# Altium PCB PCB5.PcbDoc (part 4 of 4)
Units mil, origin at the board's own origin, x right, y up, seen from the top; angles counter-clockwise.
Board outline 1968.5 x 2362.2 mil, 4 copper layers (Top Layer, GND, VCC, Bottom Layer), stack 30.634 mil thick; 134 components, 248 nets, 1063 pads, 694 vias.
Unrouted connection lines stored in the file: 163.
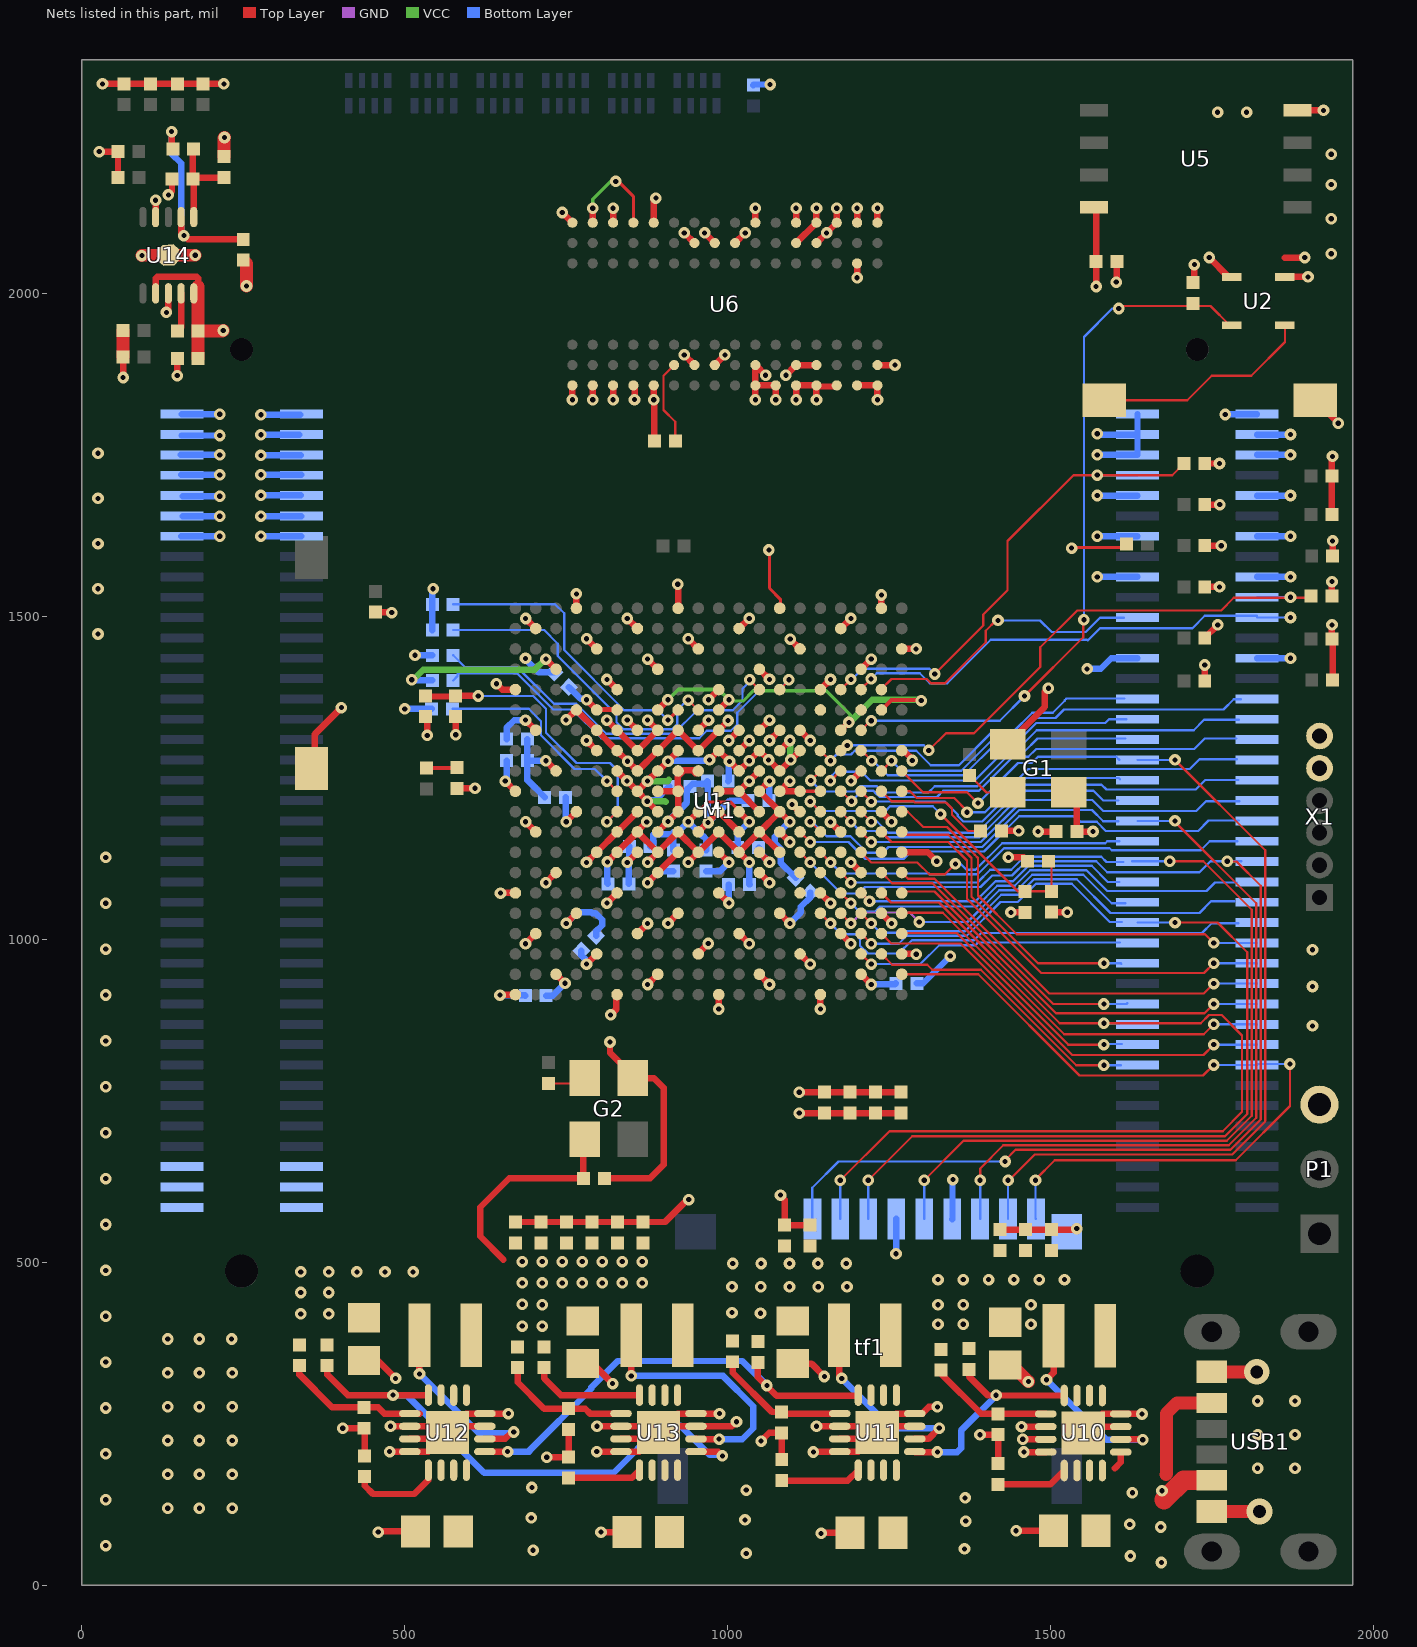
[diagram p6: the nets of this part, all layers, seen from the top]

## Via types
v1: diameter 18, hole 8, Top Layer to Bottom Layer, tented both sides, 692 vias
v2: diameter 40, hole 20, Top Layer to Bottom Layer, tented both sides, 2 vias

## Nets (pads, with @x,y where several pads share a name; then routed paths per layer and width w, separated by ;. In a path a pad name is that pad's centre, name@x,y a point inside that pad or via, vN(x,y) a via of type N, cw(c..) or ccw(c..) an arc to the next point about the centre after c; other vN are vias at no path point) (continued)
GND: C1.1 C2.1 C3.1 C4.2 C5.2 C6.1 C7.1 C8.2 C9.2 C10.2 C12.2 C13.2 C14.2 C15.2 C16.2 C17.2 C18.2 C21.2 C22.2 C23.2 C24.1 C25.1 C26.1 C27.1 C30.2 C31.2 C33.2 C35.2 C37.2 C39.2 C42.2 C44.2 C45.2 C46.2 C47.2 C48.2 C113.2 C114.2 C115.2 C117.2 C119.2 C120.2 C122.2 C124.2 C126.2 C127.1 C128.1 C129.1 C130.1 C131.1 C132.1 C133.1 C134.1 C135.1 C136.1 C137.1 C138.1 C148.2 C213.2 DONE.2 G1.2 G2.2 M1.J1_67 M1.J1_68 M1.J1_69 M1.J1_70 M1.J1_71 M1.J1_72 M1.J1_73 M1.J1_74 M1.J2_1 M1.J2_2 M1.J2_3 M1.J2_4 M1.J2_5 M1.J2_6 M1.J2_9 M1.J2_10 M1.J2_13 M1.J2_14 M1.J2_17 M1.J2_18 M1.J2_25 M1.J2_26 P1.3 R3.1 R6.1 R9.1 R12.1 R18.2 R22.2 R42.1 R52.1 R53.1 R54.1 R55.1 R57.1 R58.1 R61.2 R67.2 R70.1 RESET1.1 RESET2.1 tf1.6 tf1.10 U1.A8 U1.A18 U1.B1 U1.B11 U1.C4 U1.C9 U1.C14 U1.D17 U1.E10 U1.E20 U1.F3 U1.F7 U1.F10 U1.G10 U1.G12 U1.G16 U1.H7 U1.H9 U1.H11 U1.H13 U1.H19 U1.J2 U1.J8 U1.J10 U1.J12 U1.K5 U1.K7 U1.K10 U1.K11 U1.K13 U1.K15 U1.L8 U1.L9 U1.L12 U1.L18 U1.M1 U1.M7 U1.M9 U1.M10 U1.M11 U1.M13 U1.N4 U1.N8 U1.N10 U1.N12 U1.N14 U1.P7 U1.P9 U1.P11 U1.P13 U1.P17 U1.R8 U1.R12 U1.R20 U1.T3 U1.T7 U1.T13 U1.U6 U1.U16 U1.V9 U1.V19 U1.W2 U1.W12 U1.Y5 U1.Y15 U2.1 U5.4 U6.A9 U6.B1 U6.B3 U6.B9 U6.D1 U6.D8 U6.E1 U6.E2 U6.E8 U6.F9 U6.G1 U6.G8 U6.G9 U6.J2 U6.J8 U6.M1 U6.M9 U6.P1 U6.P9 U6.T1 U6.T9 U10.6 U10.7 U10.8 U10.15 U10.16 U10.20 U11.6 U11.7 U11.8 U11.15 U11.16 U11.20 U12.6 U12.7 U12.8 U12.15 U12.16 U12.20 U13.6 U13.7 U13.8 U13.15 U13.16 U13.20 U14.4 U14.8 U14.11 USB1.A12 USB1.B12 X1.5 | length 9508.1
  Top Layer w3.5: U1.C9@1206.85,1260.85 U1.C9@1207.15,1261.15
  Top Layer w6: U1.F10@1112.35,1229.45 U1.E10@1143.85,1229.45
  Top Layer w10: v1(27,2220) C1.1@55.86,2220 56,2219.86 C2.1@56,2180 ; v1(32,2325) C27.1@65,2325 C24.1@106.09,2325 C25.1@148,2325 C26.1@188,2325 v1(220,2325) ; v1(63.86,1870.14) C6.1@63.86,1902 ; U14.4@114.3,2118.7 v1(114.3,2144.7) ; v1(131,1971) 134,1974 U14.8@134,2000.5 ; v1(134,2153) 139.64,2158.64 R18.2@139.64,2177.59 ; v1(147.86,1873.14) C5.2@147.86,1900 ; RESET2.1@356,1264.61 361,1269.61 361,1318 v1(402,1359) ; v1(404.14,242.86) R9.1@437,242.86 438,241.86 C134.1@438,200.14 ; C135.1@437,348 458,348 v1(486,320) ; v1(459,82) 460,83 C133.1@517,83 ; v1(476.59,206.59) U12.8@508.05,206.59 536.65,206.59 U12.20@556.35,226.29 ; v1(478.11,245.89) U12.6@508.05,245.89 556.35,245.89 U12.20@566.15,236.09 ; U12.7@508.05,226.29 U12.20@556.35,226.29 ; v1(535,1316) DONE.2@535,1343.86 ; U12.15@624.25,245.89 U12.20@575.95,245.89 ; v1(642,1396) 651.15,1386.85 U1.Y5@671.45,1386.85 ; v1(648.36,1071.71) 648.6,1071.95 U1.Y15@671.45,1071.95 ; v1(660.59,265.59) U12.16@624.25,265.59 595.65,265.59 U12.20@575.95,245.89 ; C37.2@671.62,562.28 C148.2@711.1,562.28 C21.2@750.57,562.28 C22.2@790.05,562.28 C18.2@869,562.28 903.28,562.28 938,597 v1(940,597) ; v1(687.25,1182.15) U1.W12@702.95,1166.45 ; v1(687.25,1497.05) U1.W2@702.95,1481.35 ; v1(718.75,1276.55) U1.V9@734.45,1260.85 ; v1(720,198) 720.14,198.14 C137.1@754,198.14 R12.1@754,240.86 ; U1.V19@734.45,945.95 v1(748.4,932) ; v1(744.03,2125.73) U6.T1@759.78,2109.98 ; v1(750,1340) 765.35,1355.35 U1.U6@765.95,1355.35 U1.T7@797.45,1323.85 U1.R8@828.95,1292.35 v1(845.3,1276) U1.P9@860.45,1260.85 U1.N8@891.95,1292.35 U1.M7@923.45,1323.85 U1.M7@923.45,1323.85 U1.L8@954.85,1292.35 U1.K7@986.45,1323.85 U1.K7@986.45,1323.85 1001,1338.4 v1(1001,1339) ; v1(750.2,1024.7) U1.U16@765.95,1040.45 ; v1(759.78,1835.74) U6.T9@759.78,1858.02 ; C138.1@776,343 791,343 v1(822,312) ; v1(781.7,1119.2) U1.T13@797.45,1134.95 U1.R12@828.95,1166.45 829.05,1166.45 U1.P11@860.45,1197.85 ; v1(781.75,1465.55) U1.T3@797.45,1449.85 ; v1(797.59,206.59) U13.8@835.05,206.59 863.65,206.59 U13.20@883.35,226.29 ; v1(797.89,245.89) U13.6@835.05,245.89 883.35,245.89 U13.20@893.15,236.09 ; v1(804,82) C136.1@844,82 ; C10.2@809.14,630 880,630 901,651 901,770 885.76,785.24 G2.2@853.4,785.24 853.4,789.18 818,824.58 v1(818,841) ; v1(819,883) 827.42,891.42 827.42,912.92 U1.R20@828.95,914.45 ; v1(822.77,1835.74) U6.P9@822.77,1858.02 ; U6.P1@822.77,2109.98 v1(822.77,2132.26) ; U13.7@835.05,226.29 U13.20@883.35,226.29 ; v1(844.7,1119.2) U1.P13@860.45,1134.95 ; v1(844.7,1339.6) U1.P7@860.45,1323.85 U1.P7@858.15,1323.85 ; U1.P17@860.45,1008.95 860.65,1008.95 v1(876.25,1024.55) ; v1(876.2,1087.7) U1.N14@891.95,1103.45 U1.M13@923.45,1134.95 ; v1(876.25,1434.05) U1.N4@891.95,1418.35 ; U6.M9@885.76,1858.02 v1(885.76,1835.74) 886.86,1834.65 R61.2@886.86,1772 ; U6.M1@885.76,2109.98 885.76,2144.76 v1(889,2148) ; U1.N12@891.95,1166.45 891.95,1166.57 907.83,1182.45 v1(907.83,1182.57) 908,1182.57 923.28,1197.85 U1.M11@923.45,1197.85 U1.M10@923.45,1229.45 ; U1.N10@891.95,1229.45 U1.M10@923.45,1229.45 ; v1(923,1550) 923.45,1549.55 U1.M1@923.45,1512.85 ; U1.M9@923.45,1260.85 U1.M9@927.48,1256.82 ; U1.L18@954.85,977.45 954.85,978.15 v1(970.25,993.55) ; U1.L12@954.85,1166.45 969.4,1181 v1(970,1181) 970,1181.2 986.45,1197.65 U1.K11@986.45,1197.85 U1.J12@1017.85,1166.45 ; U1.L9@954.85,1260.85 953.85,1260.85 950.32,1257.32 945.98,1261.65 932.31,1261.65 U1.M9@927.48,1256.82 ; v1(964.5,2094.24) U6.J2@980.25,2078.49 ; v1(970.6,1371) U1.K5@986.45,1386.85 ; U6.J8@980.25,1889.51 v1(996,1905.26) ; U1.K15@986.45,1071.95 v1(1002.15,1056.25) ; U1.K13@986.45,1134.95 v1(1002.15,1119.25) ; U1.K10@986.45,1229.45 U1.J10@1017.85,1229.45 ; v1(987.59,265.59) U13.16@951.25,265.59 922.65,265.59 U13.20@902.95,245.89 ; v1(1014,253) 1006.89,245.89 U13.15@951.25,245.89 U13.20@902.95,245.89 ; U1.J8@1017.85,1292.35 v1(1033.55,1308.05) ; U1.J2@1017.85,1481.35 v1(1033.6,1497.1) ; v1(1043.24,1835.74) U6.G9@1043.24,1858.02 ; U6.G1@1043.24,2109.98 v1(1043.24,2132.26) ; U1.H19@1049.35,945.95 v1(1065.1,930.2) ; U1.H13@1049.35,1134.95 v1(1065.1,1119.2) ; U1.H11@1049.35,1197.85 U1.J10@1017.85,1229.45 U1.J10@1017.85,1229.45 ; U1.H9@1049.35,1260.85 1049.25,1260.85 v1(1033.55,1245.15) U1.J10@1017.85,1229.45 ; U1.H7@1049.35,1323.85 v1(1065.1,1339.6) ; v1(1052,223) 1064.76,235.76 R6.1@1083.85,235.76 1083.85,194.29 C132.1@1084,194.14 ; v1(1058.99,1873.76) U6.G8@1043.24,1889.51 U6.G9@1043.24,1858.02 ; v1(1074.74,1835.74) U6.F9@1074.74,1858.02 U6.G9@1043.24,1858.02 ; U1.G16@1080.85,1040.45 v1(1096.6,1024.7) ; U1.G12@1080.85,1166.45 v1(1096.55,1150.75) ; v1(1082,604) 1082,603 1088.37,596.63 C120.2@1088.37,557.28 C126.2@1128,557.28 ; v1(1090.49,1873.76) U6.E8@1106.24,1889.51 U6.D8@1137.73,1889.51 ; v1(1096.55,1245.15) U1.G10@1080.85,1229.45 U1.F10@1112.35,1229.45 ; v1(1097.2,1465) U1.F3@1112.35,1449.85 ; C131.1@1101,343 1130,343 v1(1150,323) ; U6.E2@1106.24,2078.49 U6.D1@1137.73,2109.98 v1(1137.73,2132.26) ; U6.E1@1106.24,2109.98 v1(1106.24,2132.26) ; v1(1111.1,763.28) C31.2@1150.57,763.28 C30.2@1190.05,763.28 C8.2@1229.52,763.28 C9.2@1269,763.28 ; U1.F7@1112.35,1323.85 v1(1128.1,1308.1) ; v1(1133,206) 1133.59,206.59 U11.8@1173.9,206.59 1202.5,206.59 U11.20@1222.2,226.29 ; v1(1137.89,245.89) U11.6@1173.9,245.89 1222.2,245.89 U11.20@1232,236.09 ; v1(1143.85,892.17) U1.E20@1143.85,914.45 ; v1(1145,80) 1146,81 C130.1@1190,81 ; U11.7@1173.9,226.29 U11.20@1222.2,226.29 ; U1.D17@1175.35,1008.95 v1(1191.1,993.2) ; v1(1191.1,1119.2) U1.C14@1206.85,1103.45 ; v1(1191.4,1245.4) U1.C9@1206.85,1260.85 ; U6.B9@1200.72,1858.02 U6.A9@1232.22,1858.02 v1(1232.22,1835.74) ; v1(1200.72,2024.72) U6.B3@1200.72,2046.99 ; U6.B1@1200.72,2109.98 v1(1200.72,2132.26) ; U1.C4@1206.85,1418.35 v1(1222.6,1434.1) ; U1.B11@1238.35,1197.85 v1(1254.05,1182.15) ; U1.B1@1238.35,1512.85 v1(1238.35,1533.35) ; U1.A18@1269.85,977.45 1291.62,977.45 v1(1292.21,976.86) ; U1.A8@1275.47,1290.03 1286,1279.5 v1(1286,1277) ; U11.15@1290.1,245.89 1248.11,245.89 U11.20@1244.95,249.05 ; v1(1325,276) 1312.02,276 1301.62,265.59 U11.16@1290.1,265.59 1261.5,265.59 U11.20@1244.95,249.05 ; v1(1391.14,232.86) R3.1@1419,232.86 C129.1@1419,188.14 ; C47.2@1421.81,550.36 C114.2@1461.85,550.36 C115.2@1501.89,550.36 1539.36,550.36 v1(1541,552) ; G1.2@1433.76,1302.4 1491.35,1360 1491.35,1383.35 v1(1497,1389) ; v1(1435,1127) 1458.86,1127 C213.2@1464.86,1121 ; v1(1438.86,1041.86) R22.2@1461,1041.86 ; v1(1447,84) C127.1@1505,84 ; v1(1455.3,245.3) U10.6@1492.9,245.3 ; v1(1457.3,225.7) U10.7@1492.9,225.7 ; v1(1459,206) U10.8@1492.9,206 ; v1(1481,1167) C46.2@1508.86,1167 ; U10.20@1551,235.5 U10.20@1560.8,245.3 ; v1(1602,2018) 1603.14,2019.14 C48.2@1603.14,2050 ; U10.15@1609.1,245.3 U10.20@1560.8,245.3 ; v1(1642,265) U10.16@1609.1,265 1580.5,265 U10.20@1560.8,245.3 ; R53.1@1739.14,1546 v1(1762,1546) ; R55.1@1739.14,1609.67 v1(1764.67,1609.67) ; R54.1@1739.14,1673.33 v1(1762.33,1673.33) ; R52.1@1739.14,1737 v1(1762,1737) ; v1(1746,2056) 1776,2026 U2.1@1780.7,2026 ; U5.4@1882.85,2284 v1(1923,2284) ; RESET1.1@1910.39,1835 v1(1946,1799.39) ; R42.1@1936.14,1532 v1(1936.14,1554.14) ; R58.1@1936.14,1658 R57.1@1936.14,1718 1936.14,1747.14 v1(1937,1748) ; U12.20@556.35,226.29 U12.20@566.15,236.09 ; U12.20@566.15,236.09 U12.20@575.95,245.89 ; U13.20@883.35,226.29 U13.20@893.15,236.09 ; U13.20@893.15,236.09 U13.20@902.95,245.89 ; U1.M10@923.45,1229.45 927.48,1233.48 922.65,1238.32 922.65,1251.98 U1.M9@927.48,1256.82 ; U11.20@1222.2,226.29 U11.20@1232,236.09 ; U11.20@1232,236.09 U11.20@1244.95,249.05
  Top Layer w20: C7.1@63.72,1943 63.86,1942.86 C6.1@63.86,1902 ; v1(93,2059) 93.6,2059.6 U14.11@134,2059.6 v1(175.6,2059.6) ; C4.2@220,2212.14 220,2241 v1(221,2242) ; C3.1@250,2051.86 255,2046.86 v1(255,2012) ; C128.1@1430,341 1440,341 v1(1466,315) ; USB1.B12@1750.19,113.74 v2(1823.73,113.74) ; USB1.A12@1750.19,330.26 v2(1819.73,330.26)
  Bottom Layer w10: M1.J1_68@153.96,1624.38 v1(213.62,1624.38) ; M1.J1_74@153.96,1719.38 v1(213.62,1719.38) ; M1.J1_70@155.96,1655.38 v1@215.62,1655.38 ; M1.J1_72@155.96,1686.38 v1@215.62,1686.38 ; v1@279.38,1687.62 M1.J1_71@339.04,1687.62 ; v1@280.38,1624.62 M1.J1_67@340.04,1624.62 ; v1@280.38,1655.62 M1.J1_69@340.04,1655.62 ; v1@280.38,1719.62 M1.J1_73@340.04,1719.62 ; v1(516,1440) R70.1@542.86,1440 ; v1(687.2,1435.19) 687.2,1433.8 707.59,1413.41 C13.2@731.59,1413.41 ; C16.2@690.14,1310 C17.2@690.14,1277 ; C12.2@716.86,1220 690.14,1246.72 C17.2@690.14,1277 ; v1(718.75,1276.55) 690.59,1276.55 C17.2@690.14,1277 ; C15.2@719.14,913 729.4,913 v1(748.4,932) ; v1(750.2,1024.7) 750.3,1024.7 767.8,1042.2 788.95,1042.2 790.7,1040.45 795.55,1040.45 805.79,1030.21 805.79,1021.92 796.41,1012.54 C39.2@796.41,1005.41 ; C42.2@847.14,1086 847.14,1116.76 v1(844.7,1119.2) 847.86,1122.36 C117.2@847.86,1144 ; v1(876.2,1087.7) 894.36,1105.86 C33.2@916,1105.86 ; v1(907.83,1182.57) 937.21,1211.96 937.21,1232.07 C122.2@942.14,1237 946.14,1241 964.86,1241 C124.2@968.86,1245 969.43,1244.43 969.43,1181.57 v1(970,1181) 1004,1215 C45.2@1031.86,1215 ; C119.2@967,1105.86 988.76,1105.86 v1(1002.15,1119.25) ; C113.2@1001.86,1085 1001.86,1056.54 v1(1002.15,1056.25) ; R67.2@1040,2323.14 1040.86,2324 v1(1066,2324) ; C35.2@1048.14,1142 1048.14,1136.16 v1(1065.1,1119.2) ; v1(1096.6,1024.7) 1113.57,1041.67 1113.57,1050.62 1128.41,1065.46 C44.2@1128.41,1072.59 ; C14.2@1293.14,932 1303,932 v1(1345,974) ; tf1.6@1347.95,566.82 1348.48,567.34 1348.48,627.48 v1(1349,628) ; v1(1557,1419) 1578,1419 1594.43,1435.43 M1.J2_25@1634.98,1435.43 ; v1(1572.58,1561.42) M1.J2_17@1634.98,1561.42 ; v1@1575.41,1624.41 M1.J2_13@1634.98,1624.41 ; v1@1575.4,1687.4 M1.J2_9@1634.98,1687.4 ; v1@1576.61,1750.39 M1.J2_5@1634.98,1750.39 M1.J2_3@1634.98,1781.89 ; v1@1577,1783 1578.11,1781.89 M1.J2_3@1634.98,1781.89 ; M1.J2_1@1634.98,1813.38 M1.J2_3@1634.98,1781.89 ; v1(1771,1813) 1771.38,1813.38 M1.J2_2@1820.03,1813.38 ; M1.J2_18@1820.02,1561.42 v1(1871.89,1561.42) ; M1.J2_10@1820.02,1687.4 v1(1871.89,1687.4) ; M1.J2_6@1820.02,1750.39 v1(1871.89,1750.39) ; M1.J2_4@1820.02,1781.89 v1(1871.89,1781.89) ; M1.J2_26@1820.03,1435.43 v1(1871.89,1435.43) ; M1.J2_14@1820.03,1624.41 v1(1871.89,1624.41)
  other v1: 37,61 37,132.07 1821,181 1879,181 37,203.13 1821,233 1879,233 37,274.2 1821,285 1879,285 37,345.27 37,416.33 37,487.4 37,558.47 37,629.53 37,700.6 37,771.67 37,842.73 1906,866 37,913.8 1906,927 1906,984 37,984.87 37,1055.93 37,1127 25,1473 25,1543 25,1613 1572.58,1624.41 277.38,1624.62 213.62,1655.38 277.38,1655.62 25,1683 213.62,1686.38 1572.58,1687.4 277.38,1687.62 277.38,1719.62 1572.58,1750.39 25,1753 1572.58,1783 1935,2062 1935,2116 1935,2169 1935,2216 1759,2281 1804,2281
MIO9: M1.J2_21 U1.B5 | length 452.5
  Top Layer w3.5: U1.B5@1238.2,1387.7 1253.95,1403.45 1308.4,1403.45 1315.1,1396.75 1336.75,1396.75 1400,1460 1400,1478 1416,1494 v1(1419,1494)
  Bottom Layer w3.5: v1(1419,1494) 1484,1494 1502,1476 1555,1476 1577,1498 M1.J2_21@1614,1498
MIO10: M1.J2_33 U1.E9 | length 557
  Top Layer w3.5: v1(1129,1246) U1.E9@1143.85,1260.85
  Bottom Layer w3.5: v1(1129,1246) 1146,1229 1197.2,1229 1205.2,1237 1231,1237 1240.6,1227.4 1311.4,1227.4 1321,1237 1386.73,1237 1439.41,1289.69 1458.69,1289.69 1480,1311 M1.J2_33@1616,1311
MIO11: U1.C6
MIO12: M1.J2_32 U1.D9 | length 708.9
  Top Layer w3.5: v1(1159.4,1245.4) U1.D9@1175.15,1261.15
  Bottom Layer w3.5: v1(1159.4,1245.4) 1159.4,1251.4 1167.65,1259.65 1207.35,1259.65 1221,1246 1383,1246 1433.69,1296.69 1451.69,1296.69 1479,1324 1722,1324 1738,1340 M1.J2_32@1792,1340
MIO13: M1.J2_29 U1.E8 | length 536.5
  Top Layer w3.5: U1.E8@1143.7,1292.5 v1(1159.45,1276.75)
  Bottom Layer w3.5: v1(1159.45,1276.75) 1168.95,1286.25 1191.25,1286.25 1197,1292 1292.35,1292 1314.6,1269.75 1358.39,1269.75 1409.64,1321 1442,1321 1472,1351 1503.64,1351 1522.25,1369.61 1522.25,1370.25 1525,1373 M1.J2_29@1615,1373
MIO14: M1.J2_22 U1.C5 | length 728.5
  Top Layer w3.5: U1.C5@1206.7,1387.7 v1(1222.45,1403.45)
  Bottom Layer w3.5: v1(1222.45,1403.45) 1231,1412 1297.8,1412 1313.05,1396.75 1340.49,1396.75 1407.74,1464 1556.8,1464 1557.8,1463 1558,1463 1577,1482 1720,1482 1739.25,1501.25 1820.02,1501.25 M1.J2_22@1820.02,1498.42 v1(1871.89,1498.42)
MIO15: M1.J2_31 U1.C8 | length 462.3
  Top Layer w3.5: U1.C8@1207.7,1292.5 v1(1223.45,1276.75)
  Bottom Layer w3.5: v1(1223.45,1276.75) 1225.25,1276.75 1248,1254 1366,1254 1418,1306 1449,1306 1478,1335 1585,1335 1591,1341 M1.J2_31@1618,1341
MIO16: M1.J2_66 tf1.9 U1.A19 | length 1241.3
  Top Layer w3.5: U1.A19@1269.85,945.95 1388.14,945.86 1545,789 1736.52,789 v1(1753,805.48) ; v1(1477,627) 1477,628 1507,658 1787,658 1871,742 v1(1871,807)
  Bottom Layer w3.5: v1(1477,627) 1477,567.69 tf1.9@1477.87,566.82 ; v1(1753,805.48) M1.J2_66@1820.03,805.47 ; M1.J2_66@1820.03,805.47 1821.55,807 v1(1871,807)
MIO17: U1.E14
MIO18: M1.J2_65 U1.B18 | length 442.1
  Top Layer w3.5: U1.B18@1238.35,977.45 1255.05,960.75 1309.25,960.75 1317.14,952.86 1392.15,952.86 1540.01,805 v1@1585,805
  Bottom Layer w3.5: v1@1585,805 M1.J2_65@1609,805
  other v1: 1583,805
MIO19: M1.J2_34 U1.D10 | length 666.5
  Top Layer w3.5: U1.D10@1176.2,1229.6 v1(1191.95,1213.85)
  Bottom Layer w3.5: v1(1191.95,1213.85) 1208.1,1230 1226,1230 1228.35,1227.65 1228.5,1227.65 1235.75,1220.4 1324.4,1220.4 1334,1230 1389.63,1230 1442.31,1282.69 1465.69,1282.69 1478,1295 1723,1295 1739,1311 M1.J2_34@1788,1311
MIO20: M1.J2_63 U1.A17 | length 413.1
  Top Layer w3.5: U1.A17@1269.93,1009.86 1354.95,1009.86 1527.8,837 v1@1586,837
  Bottom Layer w3.5: v1@1586,837 1587,838 M1.J2_63@1611,838
  other v1: 1583,837
MIO21: U1.F14
MIO22: M1.J2_64 U1.B17 | length 666.1
  Top Layer w3.5: U1.B17@1238.35,1008.95 1253.55,993.75 1361.16,993.75 1533.91,821 1737.02,821 v1(1753,836.98)
  Bottom Layer w3.5: v1(1753,836.98) M1.J2_64@1820.02,836.97
MIO23: M1.J2_39 U1.D11 | length 482.3
  Top Layer w3.5: U1.D11@1175.35,1197.85 v1(1191.1,1182.1)
  Bottom Layer w3.5: v1(1191.1,1182.1) v1(1191.1,1182.1) 1205.3,1167.9 1228.46,1167.9 1228.56,1168 1236,1168 1246,1158 1389.7,1158 1461.7,1230 1567,1230 1582,1215 M1.J2_39@1605,1215
MIO24: M1.J2_62 U1.A16 | length 634.9
  Top Layer w3.5: U1.A16@1269.85,1040.45 1270.65,1041.25 1333.45,1041.25 1521.7,853 1737.53,853 v1(1753,868.47)
  Bottom Layer w3.5: v1(1753,868.47) M1.J2_62@1820.02,868.46
MIO25: U1.F15
MIO26: M1.J2_60 U1.A15 | length 634.9
  Top Layer w3.5: U1.A15@1269.85,1071.95 1271.9,1074 1320.5,1074 1508.75,885.75 1738.74,885.75 v1(1753,900.01)
  Bottom Layer w3.5: v1(1753,900.01) M1.J2_60@1820.02,900
MIO27: U1.D13
MIO28: M1.J2_50 U1.C16 | length 653.3
  Top Layer w3.5: U1.C16@1206.85,1040.45 v1(1222.6,1024.7)
  Bottom Layer w3.5: v1@1222.6,1023.6 1223.7,1023.6 1236.85,1010.45 1272.55,1010.45 1274.85,1012.75 1367.75,1012.75 1424,1069 1450.7,1069 1474.7,1093 1541,1093 1593,1041 1731,1041 1749,1059 1785,1059
MIO29: M1.J2_43 U1.C13 | length 443.2
  Top Layer w3.5: U1.C13@1206.85,1134.95 1222.8,1119 1294,1119 1312.25,1100.75 1336.75,1100.75 v1(1353,1117)
  Bottom Layer w3.5: v1(1353,1117) 1360.75,1117 1370,1107.75 1384.25,1107.75 1425.5,1149 1585,1149 1588,1152 M1.J2_43@1607,1152
MIO30: M1.J2_47 U1.C15 | length 438.6
  Top Layer w3.5: U1.C15@1206.85,1071.95 1219.8,1059 v1(1220,1059)
  Bottom Layer w3.5: v1(1220,1059) 1384,1059 1415,1090 1442,1090 1466,1114 1564,1114 1589,1089 M1.J2_47@1607,1089
MIO31: M1.J2_52 U1.E16 | length 698.5
  Top Layer w3.5: U1.E16@1143.85,1040.45 v1(1159.6,1024.7)
  Bottom Layer w3.5: v1(1159.6,1024.7) 1176.3,1008 1198,1008 1205.35,1000.65 1205.35,990.3 1217.65,978 1265,978 1285.75,998.75 1381.75,998.75 1393,1010 1735,1010 1750,1025 M1.J2_52@1791,1025
MIO32: M1.J2_58 U1.A14 | length 634.2
  Top Layer w3.5: U1.A14@1269.85,1103.45 1279.55,1093.75 1320.55,1093.75 1498.3,916 1737.5,916 v1(1753,931.5)
  Bottom Layer w3.5: v1(1753,931.5) M1.J2_58@1820.03,931.49
MIO33: M1.J2_48 U1.D15 | length 670.8
  Top Layer w3.5: U1.D15@1175.35,1071.95 v1(1191.1,1056.2)
  Bottom Layer w3.5: v1(1191.1,1056.2) 1204.35,1042.95 1228.09,1042.95 1236.14,1051 1385.9,1051 1417.9,1083 1444.9,1083 1468.9,1107 1556,1107 1588,1075 1742,1075 1755,1088 M1.J2_48@1789,1088
MIO34: M1.J2_55 U1.A12 | length 460
  Top Layer w3.5: U1.A12@1269.85,1166.45 1274.3,1162 1342,1162 1378,1126 1378,1066 1481,963 v1(1583,963)
  Bottom Layer w3.5: v1(1583,963) 1609,963 M1.J2_55@1610,962
MIO35: M1.J2_42 U1.F12 | length 743.2
  Top Layer w3.5: U1.F12@1112.35,1166.45 v1(1128.05,1150.75)
  Bottom Layer w3.5: v1@1128.05,1154.05 v1(1128.05,1150.75) 1187.25,1150.75 1213,1125 1273.5,1125 1284.5,1136 1397.4,1136 1451.95,1190.55 1538.45,1190.55 1547,1182 1572,1182 1586,1168 1729,1168 1745,1184 M1.J2_42@1792,1184
MIO36: M1.J2_54 U1.A11 | length 668.3
  Top Layer w3.5: U1.A11@1269.85,1197.85 1279.15,1197.85 1303,1174 1340,1174 1383,1131 ; 1382.95,1130.95 1388,1125.9 1388,1068 1448,1008 1739.5,1008 v1(1753,994.5)
  Bottom Layer w3.5: v1(1753,994.5) M1.J2_54@1820.02,994.49
MIO37: M1.J2_36 U1.A10 | length 567.9
  Top Layer w3.5: U1.A10@1269.85,1229.45 1282.55,1229.45 1293,1219 1351,1219 1371,1199 v1(1371,1197)
  Bottom Layer w3.5: v1(1371,1197) 1381.85,1197 1382.1,1196.75 1398.75,1196.75 1465.75,1263.75 1715.75,1263.75 1731,1279 M1.J2_36@1789,1279
MIO38: M1.J2_44 U1.E13 | length 684.2
  Top Layer w3.5: U1.E13@1143.85,1134.95 v1(1159.6,1119.2)
  Bottom Layer w3.5: v1(1159.6,1119.2) 1176.8,1102 1312,1102 1313.25,1100.75 1387.75,1100.75 1428.25,1141.25 1591.75,1141.25 1595,1138 1733,1138 1747,1152 M1.J2_44@1790,1152
MIO39: M1.J2_53 U1.C18 | length 421.5
  Top Layer w3.5: U1.C18@1206.85,977.45 v1(1222.6,961.7)
  Bottom Layer w3.5: v1(1222.6,961.7) 1298.7,961.7 1328,991 1383.9,991 1387.9,995 M1.J2_53@1608,995
MIO46: M1.J2_49 U1.D16 | length 508.7
  Top Layer w3.5: U1.D16@1175.35,1040.45 v1(1191.1,1024.7)
  GND w3.5: v1(1191.1,1024.7) 1208,1041.6 1282.4,1041.6 v1(1297,1027)
  Bottom Layer w3.5: v1(1297,1027) 1371.8,1027 1420.8,1076 1447.8,1076 1471.8,1100 1551,1100 1595,1056 M1.J2_49@1616,1056
MIO47: M1.J2_59 U1.B14 | length 465.3
  Top Layer w3.5: U1.B14@1238.35,1103.45 1255.05,1086.75 1317.65,1086.75 1504.4,900 v1@1586,900
  Bottom Layer w3.5: v1@1586,900 1618,900 M1.J2_59@1619,901
  other v1: 1583,900
MIO48: M1.J2_56 U1.B12 | length 712.9
  Top Layer w3.5: U1.B12@1238.35,1166.45 1253.8,1151 1342,1151 1371,1122 1371,1063.1 1486.1,948 1738,948 v1(1753,963)
  Bottom Layer w3.5: v1(1753,963) M1.J2_56@1820.02,962.99
MIO49: M1.J2_40 U1.C12 | length 632.9
  Top Layer w3.5: U1.C12@1206.85,1166.45 v1(1222.55,1150.75)
  Bottom Layer w3.5: v1(1222.55,1150.75) 1392.34,1150.75 1457.6,1216 1565,1216 1582,1199 1726,1199 1741,1214 M1.J2_40@1793,1214
MIO50: U1.B13
MIO51: M1.J2_30 U1.B9 | length 615.6
  Top Layer w3.5: U1.B9@1238.35,1260.85 v1(1254.05,1276.55)
  Bottom Layer w3.5: v1(1254.05,1276.55) 1269.61,1261 1362,1261 1414,1313 1445,1313 1475,1343 1508,1343 1521,1356 1768,1356 1784,1372 M1.J2_30@1795,1372
MIO52: M1.J2_37 U1.C10 | length 450.4
  Top Layer w3.5: U1.C10@1206.85,1229.15 v1(1222.6,1213.4)
  Bottom Layer w3.5: v1(1222.6,1213.4) 1336.6,1213.4 1356.75,1193.25 1356.75,1191.1 1365.1,1182.75 1394.65,1182.75 1461.95,1250.05 1605.95,1250.05 M1.J2_37@1608,1248
MIO53: M1.J2_38 U1.C11 | length 638
  Top Layer w3.5: U1.C11@1206.85,1197.85 v1(1222.55,1182.15)
  Bottom Layer w3.5: v1(1222.55,1182.15) 1231.75,1182.15 1248.9,1165 1386.8,1165 1461.4,1239.6 1579.4,1239.6 1587,1232 1725,1232 1740,1247 M1.J2_38@1791,1247
MMC-CMD: M1.J2_51 tf1.3 U1.C17 | length 1602.6
  Top Layer w3.5: U1.C17@1206.85,1008.95 v1(1222.6,993.2) ; v1(1218.03,627) 1286.03,695 1770.31,695 1805,729.69 1805,980 1758.97,1026.03 v1(1693,1026.03)
  Bottom Layer w3.5: tf1.3@1218.03,566.82 v1(1218.03,627) ; v1(1222.6,993.2) 1265.2,993.2 1277.75,1005.75 1370.65,1005.75 1422.9,1058 1449.6,1058 1477.6,1086 1533,1086 1592,1027 M1.J2_51@1611,1027 ; M1.J2_51@1634.98,1025.98 v1(1693,1026.03)
MMC-D0: M1.J2_41 tf1.7 U1.E12 | length 1662.3
  Top Layer w3.5: v1(1128.25,1182.25) U1.E12@1144,1166.5 ; v1(1391.26,627) 1391.26,645.26 1427,681 1776.11,681 1819,723.89 1819,1055.85 1693,1181.85 v1(1693,1183.51)
  Bottom Layer w3.5: v1(1128.25,1182.25) 1130.75,1182.25 1153.13,1159.87 1190.62,1159.87 1216.5,1134 1240.5,1134 1249.5,1143 1394.5,1143 1452,1200.5 1564.5,1200.5 1582,1183 M1.J2_41@1605,1183 ; tf1.7@1391.26,566.82 v1(1391.26,627) ; M1.J2_41@1634.98,1183.46 v1(1693,1183.51)
MMC-D1: M1.J2_35 tf1.8 U1.A9 | length 1562
  Top Layer w3.5: U1.A9@1269.85,1260.85 1302.7,1228 1371,1228 v1(1388,1211) ; v1(1434.57,627) 1436,627 1476,667 1781.91,667 1833,718.09 1833,1138 v1(1693,1278)
  Bottom Layer w3.5: v1(1388,1211) 1450,1273 1471,1273 1481,1283 1602,1283 M1.J2_35@1607,1278 ; tf1.8@1434.57,566.82 v1(1434.57,627) ; M1.J2_35@1634.98,1277.95 M1.J2_35@1634.98,1277.95 v1(1693,1278)
MMC-D2: M1.J2_46 tf1.1 U1.F13 | length 1962.8
  Top Layer w3.5: U1.F13@1112.35,1134.95 v1(1128.1,1119.2) ; v1(1430,656) 1430,658 1446,674 1779.01,674 1826,720.99 1826,1083 1788.25,1120.75 1774.25,1120.75 v1(1774,1121)
  Bottom Layer w3.5: v1(1128.1,1119.2) 1176.3,1071 1203,1071 1213,1081 1392,1081 1410,1099 1440.64,1099 1462.64,1121 1571,1121 1588,1104 1731,1104 1748,1121 v1(1774,1121) M1.J2_46@1796,1121 ; tf1.1@1131.42,566.82 1131.42,615.42 1172,656 v1(1430,656)
MMC-D3: M1.J2_61 tf1.2 U1.B15 | length 1525.1
  Top Layer w3.5: v1(1174.72,627) 1250.72,703 1767,703 1797,733 1797,851 1765.28,882.72 1745.61,882.72 1732.89,870 v1(1583,870) 1514.6,870 1327.6,1057 1253.3,1057 U1.B15@1238.35,1071.95
  Bottom Layer w3.5: tf1.2@1174.72,566.82 v1(1174.72,627) ; v1@1587,870 M1.J2_61@1607,870
MMC-SCLK: M1.J2_45 tf1.5 U1.D14 | length 1608.3
  Top Layer w3.5: U1.D14@1175.35,1103.45 v1(1191.1,1087.7) ; v1(1304.65,627) 1365.65,688 1773.21,688 1812,726.79 1812,1046 1736.95,1121.05 v1(1685.02,1121.05)
  Bottom Layer w3.5: v1(1191.1,1087.7) 1191.4,1088 1387,1088 1406.75,1107.75 1439.49,1107.75 1459.74,1128 1579,1128 1587,1120 M1.J2_45@1613,1120 ; tf1.5@1304.65,566.82 v1(1304.65,627) ; M1.J2_45@1627.05,1121.05 v1(1685.02,1121.05)
NetC4_1: C4.1 R17.2 R18.1 U14.1 | length 155.4
  Top Layer w10: R17.2@173.14,2224 171.92,2222.78 R18.1@171.92,2177.59 ; U14.1@173.4,2118.7 173.4,2176.11 R18.1@171.92,2177.59 ; C4.1@220,2179.86 174.18,2179.86 R18.1@171.92,2177.59
NetC129_2: C129.2 U10.9 | length 111.4
  Top Layer w10: C129.2@1419,155.86 1499.96,155.86 U10.9@1521.5,177.4
NetC132_2: C132.2 U11.9 | length 125.2
  Top Layer w10: C132.2@1084,161.86 1186.36,161.86 U11.9@1202.5,178
NetC134_2: C134.2 U12.9 | length 142.2
  Top Layer w10: C134.2@438,167.86 438,154 451,141 515,141 536.65,162.65 U12.9@536.65,178
NetC137_2: C137.2 U13.9 | length 114.7
  Top Layer w10: C137.2@754,165.86 851.51,165.86 U13.9@863.65,178
NetDONE_1: DONE.1 R35.1 U1.R11 | length 463.9
  Top Layer w3.5: v1(813.25,1182.15) U1.R11@828.95,1197.85
  Top Layer w10: DONE.1@535,1376.14 578,1376.14 R35.1@579,1377.14 604.74,1377.14
  Bottom Layer w3.5: v1(614,1377) 699,1377 719,1357 719,1320 766,1273 818,1273 830,1261 830,1198.9 v1(813.25,1182.15)
NetG1_3: G1.3 R59.1 | length 69.6
  Top Layer w3.5: R59.1@1375,1253.86 1401.26,1227.6 G1.3@1433.76,1227.6
NetG2_3: G2.3 R15.1 | length 59.1
  Top Layer w3.5: R15.1@723,776.86 770.21,776.86 G2.3@778.6,785.24
NetL1_1: L1.1 U10.1 U10.2 U10.3
NetL2_1: L2.1 U11.1 U11.2 U11.3
NetL3_1: L3.1 U12.1 U12.2 U12.3
NetL4_1: L4.1 U13.1 U13.2 U13.3
NetR2_1: R2.1 R3.2 U10.5 | length 193.4
  Top Layer w10: R2.1@1331,332.86 1331,327 1392.86,265.14 R3.2@1419,265.14 1419.14,265 U10.5@1492.9,265
NetR5_1: R5.1 R6.2 U11.5 | length 209
  Top Layer w10: R5.1@1008,345.86 1008,329 1068.95,268.05 R6.2@1083.85,268.05 1086.3,265.59 U11.5@1173.9,265.59
NetR8_1: R8.1 R9.2 U12.5 | length 225.5
  Top Layer w10: R8.1@337,339.86 337,326 387.86,275.14 R9.2@437,275.14 458.86,275.14 468.41,265.59 U12.5@508.05,265.59 U12.5@523.61,265.59
NetR10_1: R10.1 U13.4 | length 175.1
  Top Layer w10: R10.1@716,336.72 716,320 741.81,294.19 U13.4@863.65,294.19
NetR11_1: R11.1 R12.2 U13.5 | length 202.8
  Top Layer w10: R11.1@675,336.72 675,314 715.86,273.14 R12.2@754,273.14 779.45,273.14 787,265.59 U13.5@835.05,265.59
NetR16_1: R16.1 U1.B10 | length 184.5
  Top Layer w3.5: U1.B10@1238.35,1229.45 1253.8,1214 1288.1,1214 1290.1,1212 1338.43,1212 1347.86,1202.57 1347.86,1193.14 1373,1168 R16.1@1391.86,1168
NetR19_1: R19.1 U14.9 | length 60.9
  Top Layer w10: R19.1@147.86,1942 153.7,1947.84 U14.9@153.7,2000.5
NetR28_1: R28.1 S0.1 | length 47.4
  Top Layer w6: S0.1@534,1265.14 580,1265.14 R28.1@581,1266.14
NetR36_2: R36.2 U1.R10 | length 320.5
  Top Layer w3.5: v1(813.25,1245.15) U1.R10@828.95,1229.45
  Bottom Layer w3.5: R36.2@574.14,1357 692,1357 711,1338 711,1316 763,1264 794.4,1264 v1(813.25,1245.15)
NetR37_1: R37.1 U1.L6 | length 499.6
  Top Layer w3.5: v1(939.1,1370.6) 954.85,1354.85 U1.L6@954.85,1355.35
  Bottom Layer w3.5: R37.1@575.14,1479 716,1479 737,1458 737,1439 828,1348 828,1336.15 838.8,1325.35 913.6,1325.35 922,1333.75 922,1355 937.6,1370.6 v1(939.1,1370.6)
NetR40_1: R40.1 U1.M6 | length 465.1
  Top Layer w5: v1(907.7,1339.6) U1.M6@923.45,1355.35
  Top Layer w10: U1.M6@923.45,1355.35 U1.M6@924.35,1355.35
  Bottom Layer w3.5: R40.1@575.14,1519 733,1519 747,1505 747,1448 840,1355 892.3,1355 v1@906.3,1341 ; v1(907.7,1339.6) v1@906.3,1341 ; v1@908,1341 v1@906.3,1341
NetR61_1: R61.1 U6.L8 | length 131.8
  Top Layer w3.5: U6.L8@917.26,1889.51 917.26,1889.26 901,1873 901,1820 919.14,1801.86 R61.1@919.14,1772
NetR69_2: R69.2 U1.G5 | length 639.6
  Top Layer w3.5: U1.G5@1080.85,1386.85 1096,1402 v1(1095,1402)
  Bottom Layer w3.5: R69.2@575.14,1401 582,1407.86 582,1412 674.1,1412 730.1,1356 760,1356 804.65,1311.35 956.35,1311.35 968,1323 1005.15,1323 1015.25,1333.1 1015.25,1344.9 1015,1345.15 1015,1351 1049,1385 1058.85,1385 1059.2,1385.35 1071,1385.35 1071.35,1385 1078,1385 v1(1095,1402)
NetR70_2: R70.2 U1.H5 | length 577.7
  Top Layer w3.5: v1(1034.2,1402) U1.H5@1049.35,1386.85
  Bottom Layer w3.5: R70.2@575.14,1440 593.14,1422 674,1422 731.18,1364.82 765.68,1364.82 812.15,1318.35 916.5,1318.35 953.15,1355 1008,1355 1023.35,1370.35 1023.35,1388.35 1034.2,1399.2 v1(1034.2,1402)
NetRESET1_2: RESET1.2 U2.3 | length 342.8
  Top Layer w3.5: RESET1.2@1583.61,1835 1712,1835 1750,1873 1811,1873 1863.3,1925.3 U2.3@1863.3,1951
PG_1V0: R1.1 U10.4 U11.13 | length 349.4
  Top Layer w10: U11.13@1290.1,206.59 1290.69,206 v1(1325,206) ; R1.1@1374,333.86 1374,323 1403.4,293.6 U10.4@1521.5,293.6
  Bottom Layer w10: v1(1325,206) 1355.81,206 1361.67,211.86 1361.67,239.33 1416,293.67 v1(1416,294)
PG_1V5: R7.1 U12.4 U13.13 | length 836.7
  Top Layer w10: R7.1@380,339.86 380,326 411.81,294.19 v1(482,294.19) U12.4@536.65,294.19 ; U13.13@951.25,206.59 985.41,206.59 v1(992,200)
  Bottom Layer w10: v1(482,294.19) 502.81,294.19 623,174 824,174 897,247 927,247 972.47,201.53 990.47,201.53 v1(992,200)
PG_1V8: R4.1 U11.4 U12.13 | length 703.3
  Top Layer w10: U12.13@624.25,206.59 v1(659.41,206.59) ; R4.1@1047,344.86 1047,322 1076,293 1201.31,293 U11.4@1202.5,294.19
  Bottom Layer w10: v1(659.41,206.59) 692.59,206.59 692.59,207.59 789,304 789,306 830,347 1023,347 v1(1061,309)
PS-MIO-VREF: C213.1 R22.1 R105.2 U1.E11 | length 508
  Top Layer w3.5: v1(1128.1,1213.6) U1.E11@1143.85,1197.85 ; v1(1330,1194) 1449.86,1074.14 R22.1@1461,1074.14 1461.22,1074.36 R105.2@1501.64,1074.36 1501.64,1116.5 C213.1@1497.14,1121
  Bottom Layer w3.5: v1(1128.1,1213.6) 1142.7,1199 1244.6,1199 1251.6,1206 1318,1206 v1(1330,1194)
V500: M1.J2_20 R42.2 U1.D8 | length 909.2
  Top Layer w3.5: U1.D8@1175.35,1292.35 v1@1185.35,1302.35 ; v1(1185.35,1300.5) v1@1185.35,1302.35 ; v1@1187.2,1304.19 v1@1185.35,1302.35 ; v1(1311.75,1292.75) 1338.25,1319.25 1381.85,1319.25 1484.45,1421.85 1484.45,1452.45 1541.5,1509.5 1764.5,1509.5 1784,1529 1869,1529 1900.86,1529 R42.2@1903.86,1532
  Bottom Layer w3.5: v1(1185.35,1300.5) 1304,1300.5 v1(1311.75,1292.75) ; M1.J2_20@1820.03,1529.92 v1(1871.89,1529.92)
V501: M1.J2_7 R52.2 U1.D5 | length 800.1
  Top Layer w3.5: U1.D5@1175.35,1386.85 v1(1191.1,1402.6) ; v1(1321,1411) 1396,1486 1396,1503 1433.8,1540.8 1433.8,1617 1535.8,1719 v1(1572.58,1719) 1688.86,1719 R52.2@1706.86,1737
  Bottom Layer w3.5: v1(1191.1,1402.6) 1192.6,1402.6 1209,1419 1313,1419 v1(1321,1411) ; v1(1572.58,1719) M1.J2_7@1634.89,1719
VCC-1V0: C42.1 C44.1 C45.1 C47.1 C113.1 C114.1 C115.1 C128.2 L1.2 R1.2 R2.2 U1.G7 U1.G11 U1.G13 U1.H10 U1.H12 U1.J7 U1.J13 U1.K12 U1.L7 U1.L13 U1.M12 U1.N7 U1.N13 U1.P8 U1.P12 U1.R7 U1.R13 U10.14 | length 1305.1
  Top Layer w10: v1(813.2,1339.6) U1.R7@828.95,1323.85 U1.P8@860.45,1292.35 U1.N7@891.95,1323.85 v1(876.2,1339.6) ; v1(814,1120) U1.R13@828.95,1134.95 U1.P12@860.45,1166.45 ; v1(875,1182) 860.45,1167.45 U1.P12@860.45,1166.45 ; v1(876.2,1119.2) U1.N13@891.95,1134.95 ; v1(939.15,1119.25) U1.L13@954.85,1134.95 ; U1.L7@954.85,1323.85 v1(970.6,1339.6) ; v1(1002,1308) U1.J7@1017.15,1323.15 ; v1(1033.55,1119.25) U1.J13@1017.85,1134.95 ; v1(1065.05,1245.15) U1.H10@1049.35,1229.45 1080.85,1197.95 U1.G11@1080.85,1197.85 ; v1(1065.1,1308.1) U1.G7@1080.85,1323.85 ; U1.G13@1080.85,1134.95 U1.H12@1049.35,1166.45 ; v1(1096.55,1182.15) U1.G11@1080.85,1197.85 ; v1(1494,318) 1504.92,328.92 L1.2@1504.92,386 ; U10.14@1609.1,225.7 1609.4,226 1644,226 v1(1643,225) ; U1.P12@860.45,1166.45 U1.N13@891.95,1134.95 ; U1.N13@891.95,1134.95 U1.M12@923.45,1166.45 U1.M12@923.45,1166.45 U1.L13@954.85,1134.95 ; U1.L13@954.85,1134.95 U1.L13@954.85,1134.95 U1.K12@986.45,1166.45 U1.K12@986.45,1166.45 U1.J13@1017.85,1134.95 ; U1.J13@1017.85,1134.95 U1.H12@1049.35,1166.45 ; U1.H12@1049.35,1166.45 U1.H12@1049.35,1166.45 U1.G11@1080.85,1197.85
  Bottom Layer w10: v1(814,1120) 814,1086.86 C42.1@814.86,1086 ; v1(1033.55,1119.25) 1033.55,1085.59 C113.1@1034.14,1085 ; C45.1@1064.14,1215 1064.6,1215.46 1064.6,1244.69 v1(1065.05,1245.15) ; v1(1096.55,1182.15) 1096.15,1182.15 1073,1159 1073,1149.55 1082.6,1139.95 1082.6,1118.4 C44.1@1105.59,1095.41 ; v1(1494,318) 1587,225 v1(1643,225)
  other v1: 1326,404 1365.2,404 1470,404 1326,434 1365.2,434 1470,434 1326,473 1365.2,473 1404.4,473 1443.6,473 1482.8,473 1522,473
VCC-1V5: C3.2 C135.2 L3.2 R7.2 R8.2 R17.1 R69.1 U1.A3 U1.D2 U1.E5 U1.G1 U1.H4 U1.L3 U1.P2 U1.R5 U1.U1 U1.V4 U6.A1 U6.A8 U6.C1 U6.C9 U6.D2 U6.D9 U6.E9 U6.H2 U6.K2 U6.K8 U6.N1 U6.N9 U6.R1 U6.R9 U12.14 U14.2 | length 1664.9
  Top Layer w5: v1(827,2174) 831,2174 854.27,2150.73 U6.N1@854.27,2109.98 ; v1(1064,1603) 1065,1602 1065,1544.04 1082,1527.04 1082,1514 U1.G1@1080.85,1512.85
  Top Layer w10: v1(139,2251) 139,2225.86 R17.1@140.86,2224 ; U14.2@153.7,2118.7 153.7,2094.3 v1(158,2090) 163.86,2084.14 C3.2@250,2084.14 ; v1(522.92,327.08) L3.2@522.92,387 ; U12.14@624.25,226.29 624.44,226.49 655.49,226.49 665,236 668,236 v1(669,237) ; v1(718.75,1434.05) U1.V4@734.45,1418.35 ; U1.U1@765.95,1512.85 v1(765.95,1535.06) ; v1(791.28,1835.74) U6.R9@791.28,1858.02 ; U6.R1@791.28,2109.98 v1(791.28,2132.26) ; v1(813.25,1402.55) U1.R5@828.95,1386.85 ; v1(844.75,1497.05) U1.P2@860.45,1481.35 ; U6.N9@854.27,1858.02 856,1856.28 v1(856,1836) ; v1(933.01,1905.26) U6.K8@948.76,1889.51 ; v1(933.01,2094.24) U6.K2@948.76,2078.49 ; v1(939.15,1465.55) U1.L3@954.85,1449.85 ; U6.H2@1011.75,2078.49 v1(1027.5,2094.24) ; U1.H4@1049.35,1418.35 v1(1065.05,1402.65) ; v1(1106.24,1835.74) U6.E9@1106.24,1858.02 U6.D9@1137.73,1858.02 ; v1(1137.73,1835.74) U6.D9@1137.73,1858.02 ; U6.D2@1137.73,2078.49 v1(1153.48,2094.24) U6.C1@1169.23,2109.98 v1(1169.23,2132.26) ; U1.E5@1143.85,1386.85 v1(1159.55,1402.55) ; U6.C9@1169.23,1858.02 1167.47,1856.26 1139.49,1856.26 U6.D9@1137.73,1858.02 ; U1.D2@1175.35,1481.35 v1(1191.1,1497.1) ; U6.A8@1232.22,1889.51 v1(1259.49,1889.51) ; U6.A1@1232.22,2109.98 v1(1232.22,2132.26) ; U1.A3@1269.85,1449.85 v1(1292.06,1449.85)
  VCC w5: v1(791.28,2132.26) 791.28,2146.28 819,2174 v1(827,2174)
  VCC w10: v1(511,1402) 513.16,1402 528.86,1417.69 701.16,1417.69 717.52,1434.05 v1(718.75,1434.05)
  Bottom Layer w10: v1(139,2251) 139,2217 154,2202 154,2094 v1(158,2090) ; v1(511,1402) 512,1401 R69.1@542.86,1401 ; v1(522.92,327.08) 614.53,235.47 667.47,235.47 v1(669,237)
  other v1: 339,420 382.5,420 339,453 382.5,453 339,485 382.5,485 426,485 469.5,485 513,485
VCC-1V8: C33.1 C35.1 C117.1 C119.1 C120.1 C122.1 C124.1 C126.1 C131.2 L2.2 R4.2 R5.2 U1.F8 U1.F11 U1.G8 U1.G9 U1.H8 U1.J9 U1.J11 U1.K8 U1.L11 U1.M8 U1.N9 U1.N11 U1.P10 U1.R9 U11.14 | length 1277.7
  Top Layer w5: U1.L11@954.85,1197.85 969.85,1212.85 1004.15,1212.85 1017.85,1199.15 U1.J11@1017.85,1197.85
  Top Layer w10: U1.R9@828.95,1260.85 v1(844.35,1245.45) ; v1@844.4,1245.5 U1.P10@860.45,1229.45 ; U1.N11@891.95,1197.85 v1(875.8,1214) U1.P10@860.45,1229.45 U1.P10@860.45,1229.45 ; U1.M8@923.45,1292.35 923.45,1291.45 v1(907.92,1275.92) 892.4,1260.4 U1.N9@891.95,1260.85 U1.N9@891.95,1260.85 v1(876.15,1245.15) U1.P10@860.45,1229.45 ; v1(939.15,1182.15) U1.L11@954.85,1197.85 ; v1(972.1,1278) U1.K8@986.45,1292.35 986.45,1292.25 v1(1003,1275.7) U1.J9@1017.85,1260.85 v1(1033.6,1276.6) U1.H8@1049.35,1292.35 v1(1063.7,1278) 1080.85,1260.85 U1.F8@1112.35,1292.35 ; U1.J11@1017.85,1197.85 v1(1033.55,1182.15) ; U1.G8@1080.85,1292.35 v1(1096.6,1308.1) ; v1(1100,1209) 1111.15,1197.85 U1.F11@1112.35,1197.85 ; L2.2@1172.77,387 1172.77,324.23 v1(1177,320) ; U11.14@1290.1,226.29 1311.29,226.29 v1(1328,243)
  VCC w10: v1(875.8,1214) 903,1214 904,1213 ; v1(876.15,1245.15) 907.15,1245.15 909,1247 ; v1(1096.6,1308.1) 1097.3,1307.4 1097.3,1278.7 v1(1098,1278)
  Bottom Layer w10: v1(875.8,1214) 877.33,1215.53 888.39,1215.53 C122.1@909.86,1237 ; C117.1@880.14,1144 885.18,1149.04 885.18,1162.22 885.5,1162.54 912.54,1162.54 916,1166 ; v1(907.92,1275.92) 908.96,1276.96 971.06,1276.96 v1(972.1,1278) ; C33.1@916,1138.14 916,1166 ; C119.1@967,1138.14 967,1155 962,1160 961.3,1160 v1(939.15,1182.15) 923,1166 916,1166 ; C124.1@1001.14,1245 1002.07,1245.93 1002.07,1274.77 v1(1003,1275.7) ; C35.1@1015.86,1142 1015.86,1164.45 v1(1033.55,1182.15) ; v1(1177,320) 1254,243 v1@1325,243
  other v1: 1051,421 1007,422 1007,462 1051.5,462 1096,462 1140.5,462 1185,462 1008,498 1052,498 1096,498 1140,498 1184,498
VCC-3V3: C5.1 C8.1 C9.1 C10.1 C12.1 C13.1 C14.1 C15.1 C16.1 C17.1 C18.1 C21.1 C22.1 C23.1 C30.1 C31.1 C37.1 C39.1 C46.1 C48.1 C138.2 C148.1 G1.4 G2.4 L4.2 M1.J1_75 M1.J1_76 M1.J1_77 M1.J1_78 M1.J1_79 M1.J1_80 R10.2 R11.2 R13.2 R16.2 R19.2 R28.2 R31.1 R32.1 R33.1 R34.1 R35.2 R36.1 R37.2 R38.2 R40.2 R60.1 R62.2 R105.1 tf1.4 U1.A13 U1.B6 U1.B16 U1.C19 U1.D7 U1.D12 U1.E15 U1.F18 U1.H14 U1.J17 U1.K6 U1.K20 U1.M16 U1.N6 U1.N19 U1.R6 U1.R15 U1.T6 U1.T8 U1.T18 U1.U11 U1.V14 U1.W7 U1.W17 U1.Y10 U1.Y20 U2.4 U5.8 U13.14 U14.7 U14.10 X1.6 | length 3761.4
  Top Layer w3.5: U1.D12@1174.85,1166.45 U1.D12@1175.15,1166.15 ; v1@1252,1026.8 v1(1254.1,1024.7)
  Top Layer w5: v1(1533,1606) 1534,1606 1535,1607 1612.86,1607 R62.2@1617.86,1612
  Top Layer w6: U1.B6@1238.35,1355.35 1253.85,1370.85 v1@1301.15,1370.85 ; v1(1300.1,1369.75) v1@1301.15,1370.8
  Top Layer w8: U1.T6@798.2,1356.1 U1.R6@828.2,1356.1
  Top Layer w10: U14.7@114.3,2000.5 114.3,2023.7 116.6,2026 178,2026 180.14,2023.86 180.14,2010.86 ; R13.2@455,1506.86 479.14,1506.86 v1(480,1506) ; v1(579,1317) R35.2@579,1344.86 ; R28.2@581,1233.86 608.86,1233.86 v1(609,1234) ; v1(647.65,913.71) 648.4,914.45 U1.Y20@671.45,914.45 ; 653,504 617,540 617,585 662,630 C10.1@776.86,630 776.86,689.02 G2.4@778.6,690.76 ; v1(655.75,1245.15) U1.Y10@671.45,1229.45 ; v1(687.2,993.2) U1.W17@702.95,1008.95 ; v1(687.2,1339.6) U1.W7@702.95,1323.85 ; v1(718.7,1087.7) U1.V14@734.45,1103.45 ; v1(750.25,1182.15) U1.U11@765.95,1197.85 ; v1(781.7,961.7) U1.T18@797.45,977.45 ; v1(781.7,1308.1) U1.T8@797.45,1292.35 ; v1(781.75,1371.05) U1.T6@797.45,1355.35 U1.T6@798.2,1356.1 ; v1(813.2,1056.2) U1.R15@828.95,1071.95 ; U1.R6@828.2,1356.1 U1.R6@828.95,1355.35 ; v1(850.92,323.92) L4.2@850.92,387 ; v1(876.2,930.2) U1.N19@891.95,945.95 ; U1.N6@891.95,1355.35 v1(907.7,1371.1) ; v1(907.75,1024.75) U1.M16@923.45,1040.45 ; U13.14@951.25,226.29 951.54,226 v1(987,226) ; v1(986.45,892.17) U1.K20@986.45,914.45 ; U1.K6@988.35,1355.35 U1.K6@986.45,1355.35 v1(1002.2,1371.1) ; U1.J17@1017.85,1008.95 v1(1033.55,993.25) ; U1.H14@1049.35,1103.45 v1(1065.1,1087.7) ; v1(1111.1,731) C31.1@1150.57,731 C30.1@1190.05,731 C8.1@1229.52,731 C9.1@1269,731 ; U1.F18@1112.35,977.45 v1(1128.1,961.7) ; U1.E15@1143.85,1071.95 v1(1159.6,1056.2) ; v1(1159.45,1181.85) 1174.85,1166.45 U1.D12@1175.35,1166.45 ; U1.D7@1175.35,1323.85 1188,1336.5 v1(1188,1336) ; U1.C19@1206.85,945.95 v1(1222.6,930.2) ; U1.B16@1238.35,1040.45 v1@1252,1026.8 ; U1.A13@1269.85,1134.95 1310.05,1134.95 v1(1324,1121) ; R16.2@1424.14,1168 v1(1451,1168) ; R105.1@1501.64,1042.08 v1(1526.08,1042.08) ; G1.4@1528.24,1227.6 1541.14,1214.7 C46.1@1541.14,1167 v1(1566,1167) ; U5.8@1567.85,2134 1570.86,2130.99 C48.1@1570.86,2050 v1(1570.86,2011.14) ; R38.2@1721,2017.14 1723,2019.14 v1(1723,2045) ; R32.1@1739.14,1400 v1(1739.14,1424.86) ; R33.1@1739.14,1467 v1(1759.14,1487) ; U2.4@1863.3,2026 v1(1899,2026) ; 1863.3,2056 v1(1894,2056) ; v1(1936.14,1487.14) R31.1@1936.14,1465 1937.14,1464 R34.1@1937.14,1402 ; R60.1@1937.14,1594 v1(1937.14,1617.14)
  Top Layer w20: C5.1@180.14,1900 R19.2@180.14,1942 ; 180.14,2010.86 R19.2@180.14,1942 ; v1(219,1943) 218,1942 R19.2@180.14,1942
  GND w6: v1(1300.1,1369.75) v1@1303.85,1366
  VCC w5: v1@1002,1369 1024,1369 1040,1385 1122.2,1385 1122.3,1385.1 1152.9,1385.1 1191.1,1346.9 1188,1343.8 v1(1188,1336)
  VCC w6: v1(907.7,1371.1) 923.99,1387.39 924.28,1387.1 986.2,1387.1 v1(1002.2,1371.1)
  VCC w8: v1@1001.05,1369.95 v1@1002,1369
  VCC w10: v1(1188,1336) 1189,1336 1224,1371 1298.85,1371 v1(1300.1,1369.75)
  Bottom Layer w10: M1.J1_76@152.96,1750.38 v1@212.62,1750.38 ; M1.J1_78@154.96,1780.38 v1@214.62,1780.38 ; M1.J1_80@154.96,1813.38 v1@214.62,1813.38 ; v1(277.38,1781.62) M1.J1_77@337.04,1781.62 ; v1@278.38,1812.62 M1.J1_79@338.04,1812.62 ; v1@279.38,1749.62 M1.J1_75@339.04,1749.62 ; v1(500,1357) R36.1@541.86,1357 ; R37.2@542.86,1479 R40.2@542.86,1519 542.86,1541.86 v1(544,1543) ; v1(647.65,913.71) 686.15,913.71 C15.1@686.86,913 ; v1(655.75,1245.15) 657.86,1247.26 C17.1@657.86,1277 ; C16.1@657.86,1310 657.86,1327.86 669.6,1339.6 v1(687.2,1339.6) ; C12.1@749.14,1220 749.69,1219.45 749.69,1182.7 v1(750.25,1182.15) ; C13.1@754.41,1390.59 772.42,1372.58 780.22,1372.58 v1(781.75,1371.05) ; C39.1@773.59,982.59 773.59,975.46 780.17,968.88 780.17,963.23 v1(781.7,961.7) ; v1(850.92,323.92) 993.08,323.92 1040,277 1040,243 1023,226 v1(987,226) ; v1(1222.6,930.2) 1259.06,930.2 C14.1@1260.86,932 ; v1(1261,513) 1261.17,513.17 1261.17,566.65 tf1.4@1261.34,566.82 tf1.4@1261.17,566.99
  other v1: 682,401 713,401 713,434 682,435 682,468 713,468 744,468 775,468 806,468 837,468 868,468 682,501 713,501 744,501 775,501 806,501 837,501 868,501 213.62,1750.38 277.38,1749.62 213.62,1780.38 213.62,1813.38 277.38,1812.62
VCC-IN: C127.2 C130.2 C133.2 C136.2 M1.J1_1 M1.J1_2 M1.J1_3 M1.J1_4 M1.J1_5 M1.J1_6 U10.10 U10.11 U10.12 U10.13 U11.10 U11.11 U11.12 U12.10 U12.11 U12.12 U13.10 U13.11 U13.12 USB1.A9 USB1.B9 | length 287.6
  Top Layer w10: 1600,181 1609.1,190.1 U10.13@1609.1,206
  Top Layer w20: 1679,171 1680,172 1680,266 1695.85,281.84 USB1.A9@1750.19,281.84
  Top Layer w30: 1676,132 1706.15,162.16 USB1.B9@1750.19,162.16
  other v1: 1672,35 1624,45 1029,49 699,54 1367,56 1671,90 1623,94 1369,99 1027,101 696,104 133,119 182,119 233,119 1368,135 1627,143 1673,146 1029,147 697,151 133,171.4 182,171.4 233,171.4 133,223.8 182,223.8 233,223.8 133,276.2 182,276.2 233,276.2 133,328.6 182,328.6 233,328.6 133,381 182,381 232,381
WDI: U1.E6
Z_NRST: R38.1 U1.C7 U2.2 | length 1135.5
  Top Layer w3.5: U1.C7@1206.85,1323.85 1221.6,1338.6 v1(1222.6,1338.6) ; v1(1460,1377) 1551,1468 1551,1496 v1(1552,1495) ; v1(1606,1977) 1610,1981 1717.14,1981 R38.1@1721,1984.86 1724.86,1981 1748,1981 1778,1951 U2.2@1780.7,1951
  Bottom Layer w3.5: v1(1222.6,1338.6) 1421.6,1338.6 v1(1460,1377) ; v1(1552,1495) 1552,1933 1596,1977 v1(1606,1977)
pads on no net: G1.1 G2.1 M1. M1.J1_35 M1.J1_65 M1.J2_57 tf1.0 tf1.11 tf1.12 U1.K9 U1.L10 U1.P1 U1.P3 U1.R1 U1.R2 U1.R3 U1.T1 U1.T2 U1.T4 U1.T5 U1.T9 U1.U2 U1.U3 U1.U4 U1.U5 U1.U7 U1.U8 U1.U9 U1.U10 U1.V1 U1.V2 U1.V3 U1.V5 U1.V6 U1.V7 U1.V8 U1.V10 U1.V11 U1.W1 U1.W3 U1.W4 U1.W5 U1.W6 U1.W8 U1.W9 U1.W10 U1.W11 U1.Y1 U1.Y2 U1.Y3 U1.Y4 U1.Y6 U1.Y7 U1.Y8 U1.Y9 U1.Y11 U1.Y12 U1.Y13 U6.B2 U6.F1 U6.G7 U6.H9 U6.J1 U6.J9 U6.L1 U6.L9 U6.M7 USB1.7 USB1.A5 USB1.B5

## Polygon pours and split planes (outlines as drawn)
GND on Top Layer "POWER3" (solid, remove dead copper, pour order 94): -120,2453 -83,2416 -83,-65 2106,-65 2110,-69 2110,2446 -94,2446 -110,2430
GND on Top Layer "POWER" (solid, pour order 92): 1714,356 1716,354 1716,90 1953,90 1953,355
VCC-IN on Top Layer "POWER" (solid, pour order 62): 89,431 94,426 285,426 285,43 287,41 288,42 699,42 1590,42 1601,53 1603,51 1603,9 114,9 90,33
VCC-IN on Top Layer "POWER" (solid, pour order 60): 1615,173 1698,173 1698,7 1547,7 1547,126 1549,128
VCC-IN on Top Layer "POWER" (solid, pour order 58): 1297,172 1401,172 1401,6 1380,6 1229,6 1229,125 1231,127
VCC-IN on Top Layer "POWER" (solid, pour order 56): 948,174 1062,174 1062,8 1031,8 880,8 880,127 882,129
VCC-IN on Top Layer "POWER" (solid, pour order 54): 625,174 738,174 738,8 708,8 557,8 557,127 559,129
VCC-1V0 on Top Layer "POWER1" (solid, remove dead copper, pour order 26): 1306,355 1387,355 1478,355 1475,352 1475,336 1536,336 1537,337 1540,340 1540,441 1540,517 1538,519 1302,519
VCC-1V8 on Top Layer "POWER1" (solid, remove dead copper, pour order 24): 981,365 1062,365 1153,365 1150,362 1150,346 1211,346 1212,347 1215,350 1215,451 1215,527 1213,529 977,529
VCC-3V3 on Top Layer "POWER1" (solid, remove dead copper, pour order 22): 655,363 736,363 827,363 824,360 824,344 885,344 886,345 889,348 889,449 889,525 887,527 651,527
VCC-1V5 on Top Layer "POWER1" (solid, remove dead copper, pour order 20): 319,356 400,356 491,356 488,353 488,337 549,337 550,338 553,341 553,442 553,518 551,520 315,520
VCC-IN on Top Layer "POWER" (solid, remove dead copper, pour order 0): 548,197 601,197 673,125 673,28 561,28 560,29 559,30 559,122 559,129 548,140
VCC-IN on Top Layer "POWER" (solid, remove dead copper, pour order 2): 879,195 932,195 1004,123 1004,26 892,26 891,27 890,28 890,120 890,127 879,138
VCC-IN on Top Layer "POWER" (solid, remove dead copper, pour order 4): 1219,195 1272,195 1344,123 1344,26 1232,26 1231,27 1230,28 1230,120 1230,127 1219,138
VCC-IN on Top Layer "POWER" (solid, remove dead copper, pour order 6): 1538,192 1591,192 1663,120 1663,23 1551,23 1550,24 1549,25 1549,117 1549,124 1538,135
NetL4_1 on Top Layer "POWER" (solid, remove dead copper, pour order 10): 879,276 955,276 955,442 952,445 951,446 898,446 898,340 893,335 889,331 876,331 876,276
NetL2_1 on Top Layer "POWER" (solid, remove dead copper, pour order 12): 1217,277 1293,277 1293,443 1290,446 1289,447 1236,447 1236,341 1231,336 1227,332 1214,332 1214,277
NetL3_1 on Top Layer "POWER" (solid, remove dead copper, pour order 8): 552,278 628,278 628,444 625,447 624,448 571,448 571,342 566,337 562,333 549,333 549,278
NetL1_1 on Top Layer "POWER" (solid, remove dead copper, pour order 18): 1536,278 1612,278 1612,444 1609,447 1608,448 1555,448 1555,342 1550,337 1546,333 1533,333 1533,278
GND on Bottom Layer "POWER3" (solid, remove dead copper, pour order 96): -58,2440 -158,2340 -158,-105 1954,-105 2103,44 2103,2458 7,2458 -52,2399
VCC-IN on Bottom Layer "POWER" (solid, pour order 52): 378,652 91,652 89,654 86,651 86,52 86,33 101,18 112,7 875,7 1693,7 1693,134 1032,134 1005,134 319,134 300,153 305,158 305,514 368,514 381,527
VCC-3V3 on VCC "POWER2" (solid, remove dead copper, pour order 88): -114,2453 -97,2436 -97,-115 2126,-115 2212,-29 2078,105 2078,2466 -57,2466 -87,2436
VCC-1V8 on VCC "POWER" (solid, pour order 66): 1274,1233 1348,1134 1274,783 1277,780 1085,588 980,588 980,433 984,429 988,425 1212,425 1212,555 1283,626 1419,762 1419,776 1419,1251 1272.47,1251
VCC-1V0 on VCC "POWER" (solid, remove dead copper, pour order 68): 1056.95,1355 1819,1355 1829,1345 1829,314 1355,314 1311,358 1311,505 1676,505 1683,498 1688,503 1688,1292 1437,1292 1423,1306 1422,1307 1053,1307
VCC-1V5 on VCC "POWER" (solid, remove dead copper, pour order 70): 704,2159 1280,2159 1282,2157 1316,2123 1316,1438 1273,1395 1252,1395 712,1395 705,1402
VCC-1V0 on VCC "POWER" (solid, remove dead copper, pour order 64): 889,1295 1081,1295 1081,1355 789,1355 783,1349 783,1341 783,1333 796,1320 798,1318 798,1274 798,1098 1115,1098 1115,1152 889,1152 889,1210
VCC-1V8 on VCC "POWER" (solid, pour order 78): 1276.16,1251 1238.16,1289 898,1289 898,1201 1232,1201 1351.17,1094 1374,1094 1374,1243 1367,1250
VCC-1V0 on VCC "POWER" (solid, pour order 84): 1075,1129.07 1075,1191 1114,1191 1115,1190 1115,1138 1103.4,1126.4
VCC-1V8 on VCC "POWER" (solid, pour order 82): 1054,1203 1054,1161 926,1161 926,1204 928,1206
VCC-1V0 on VCC "POWER" (solid, pour order 80): 1073.55,1355 1074,1355.45 1074,1377 1119,1377 1119,1344 1077.35,1344 1076.88,1344.48
VCC-1V0 on VCC "POWER" (solid, pour order 76): 1272.67,1292
VCC-1V5 on VCC "POWER" (solid, remove dead copper, pour order 74): 105,2276 107,2274 107,2074 486,2074 575,1985 654,1906 735,1906 735,1972 738,1975 597,2116 450,2116 203,2116 191,2128 194,2131 194,2276
VCC-1V5 on VCC "POWER" (solid, remove dead copper, pour order 72): 710,1517 680,1487 508,1487 487,1487 429,1429 422,1422 422,582 414,582 330,498 330,429 567,429 570,432 570,577 569,577 522,624 513,633 513,1256 513,1311 482,1342 481,1343 481,1375 493,1375 503,1385 517,1371 724,1371 724,1405 738,1419
GND on GND "POWER" (solid, remove dead copper, pour order 90): -51,2446 -69,2428 -69,-89 2008,-89 2095,-2 2095,2557 163,2557 11,2405

## Keep-outs
Keep-Out Layer:
  the board outline again, w3.5

## Silkscreen, mask and mechanical layers (free items; w line width, h text height)
Top Overlay:
  lines w3.5: 391,561 392,562